# Altium PCB PCB1.PcbDoc
Units mil, origin at the board's own origin, x right, y up, seen from the top; angles counter-clockwise.
Board outline 2820 x 2327.84 mil, 4 copper layers (Top Layer, Layer 1, Layer 2, Bottom Layer), stack 23.756 mil thick; 37 components, 29 nets, 121 pads, 10 vias.
Unrouted connection lines stored in the file: 2.
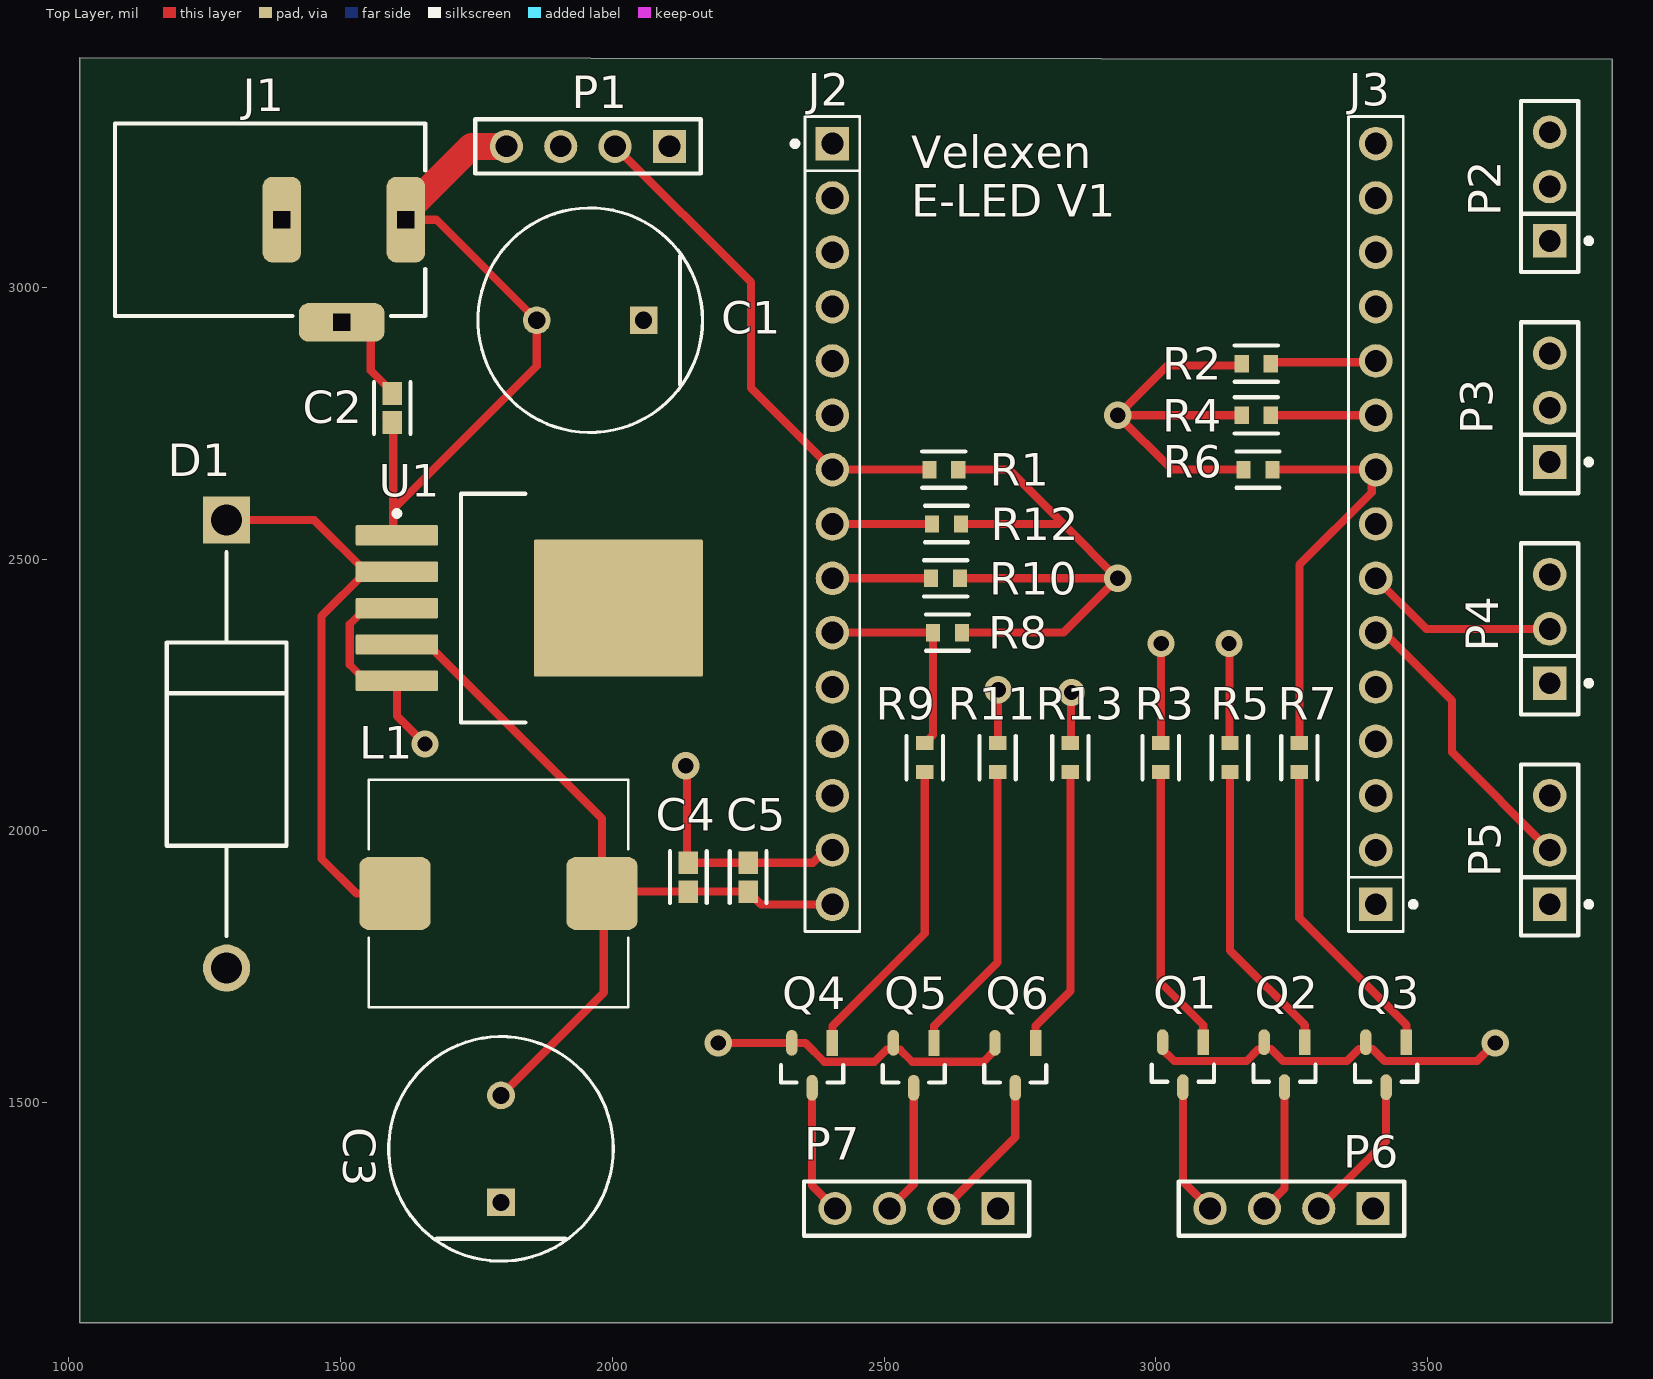
[diagram p0: Top Layer view]
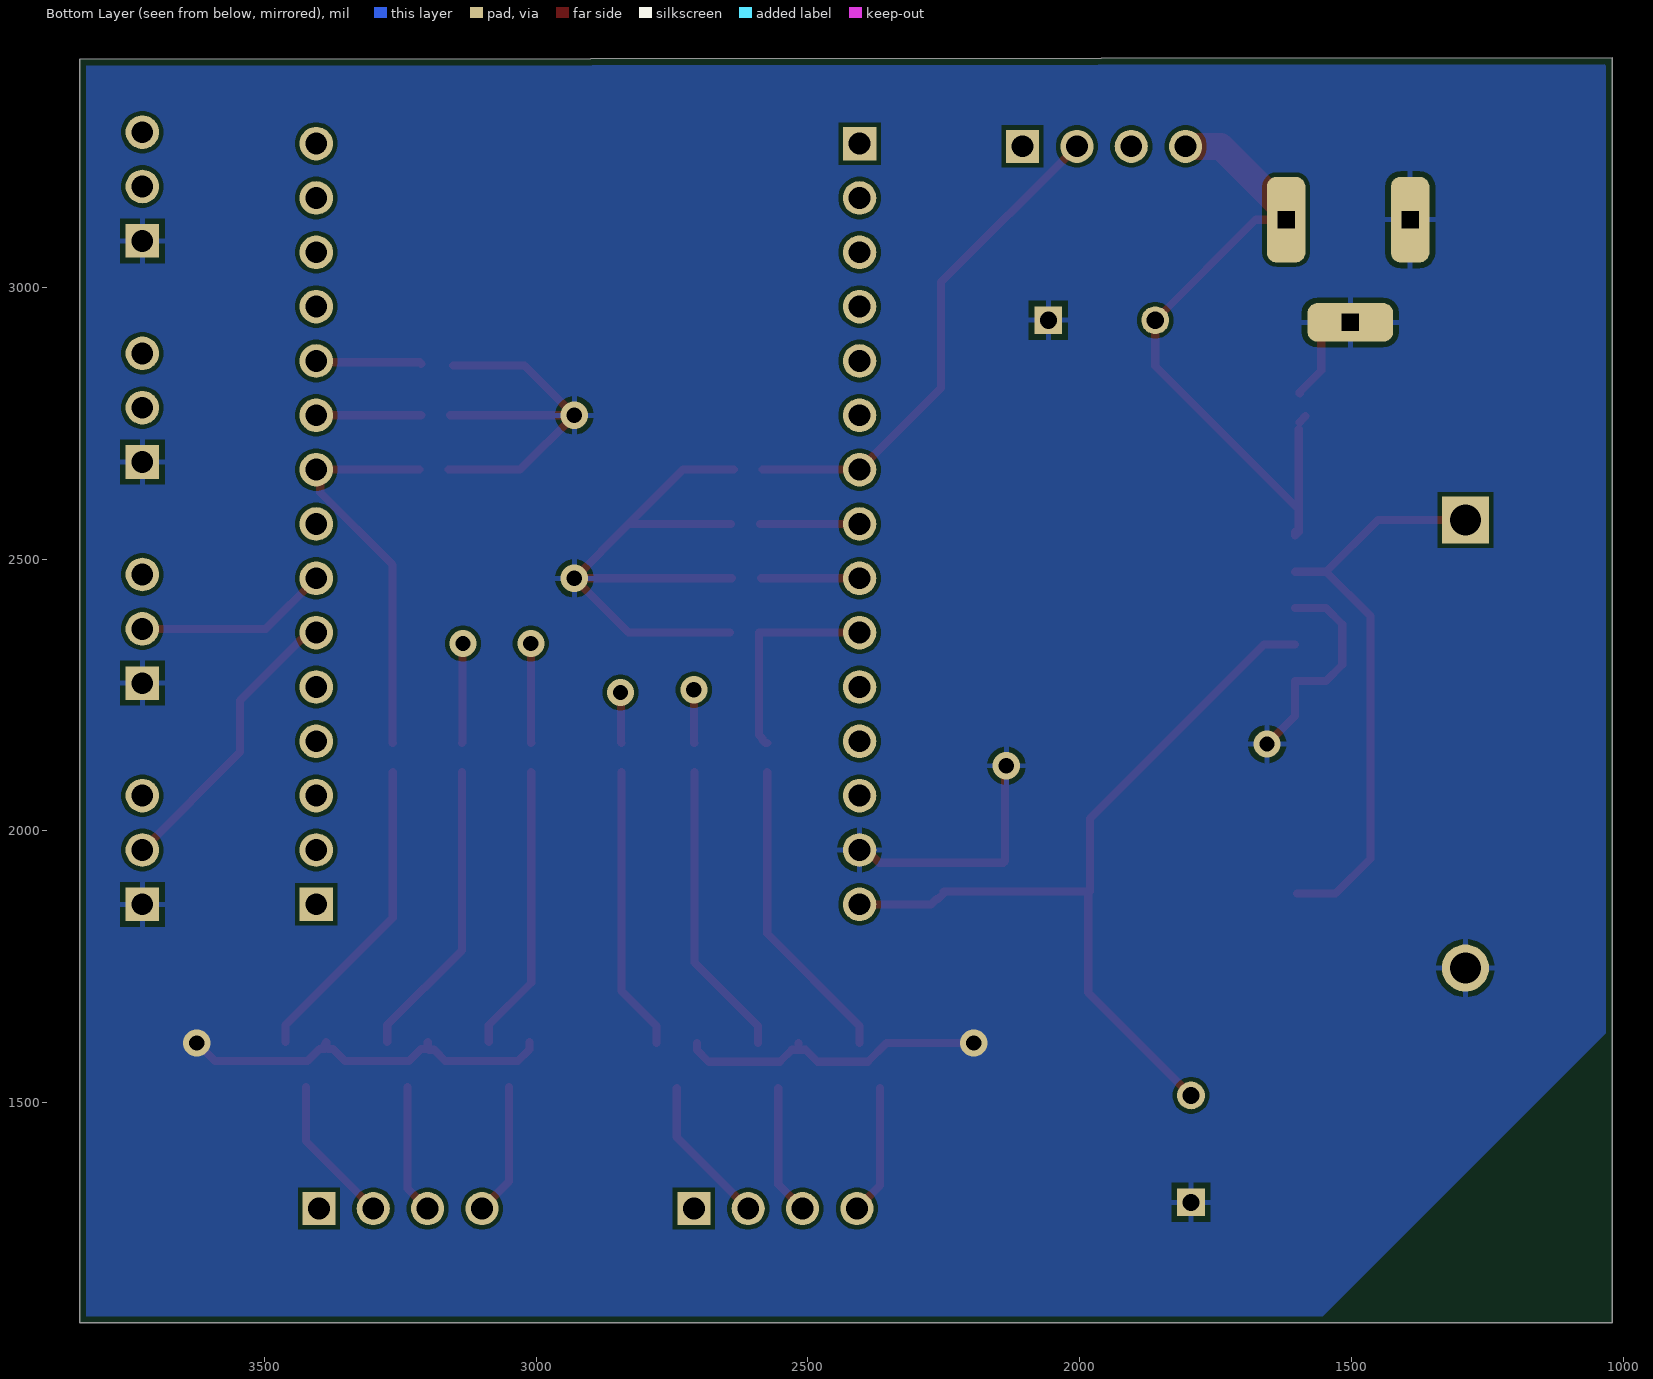
[diagram p1: Bottom Layer view, seen from below]
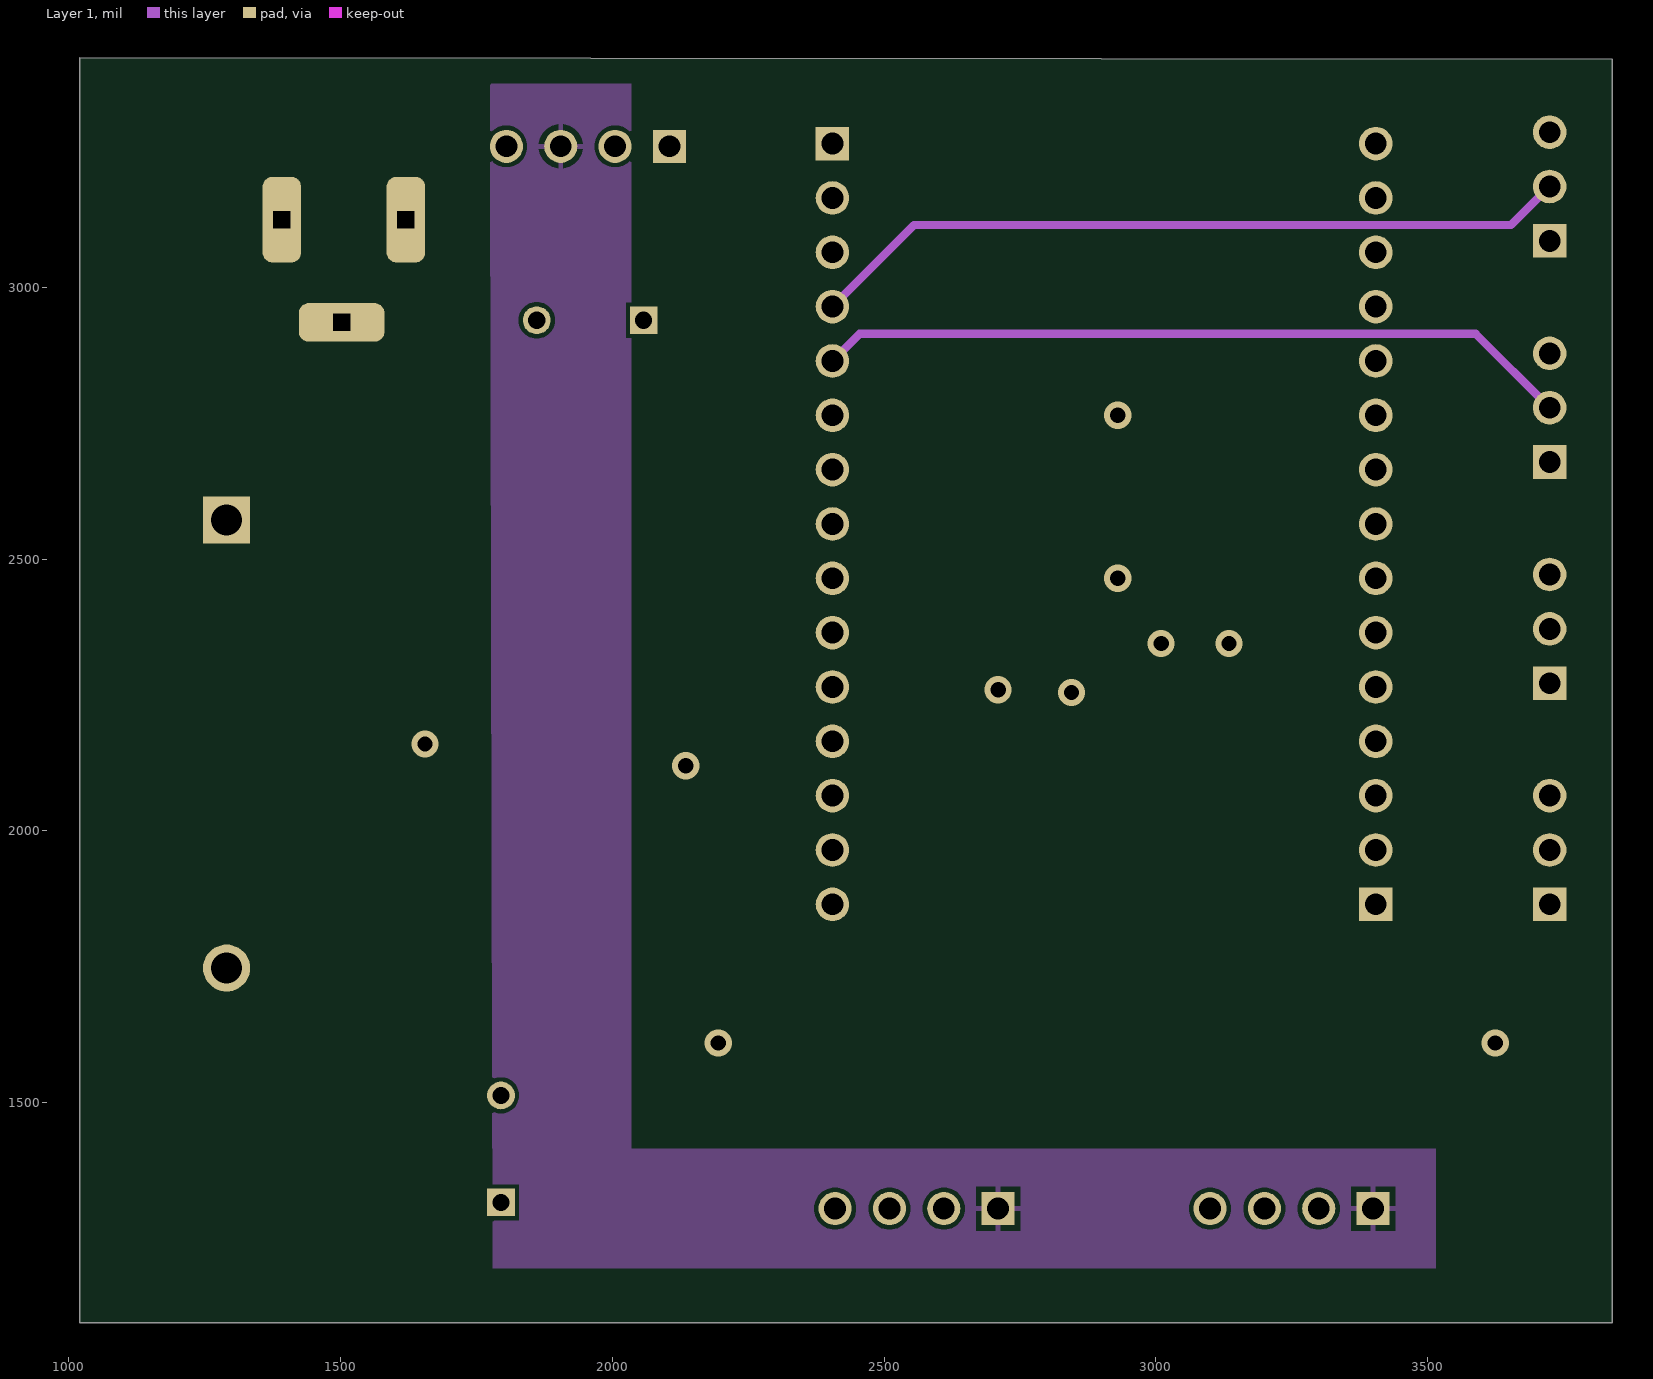
[diagram p2: Layer 1]
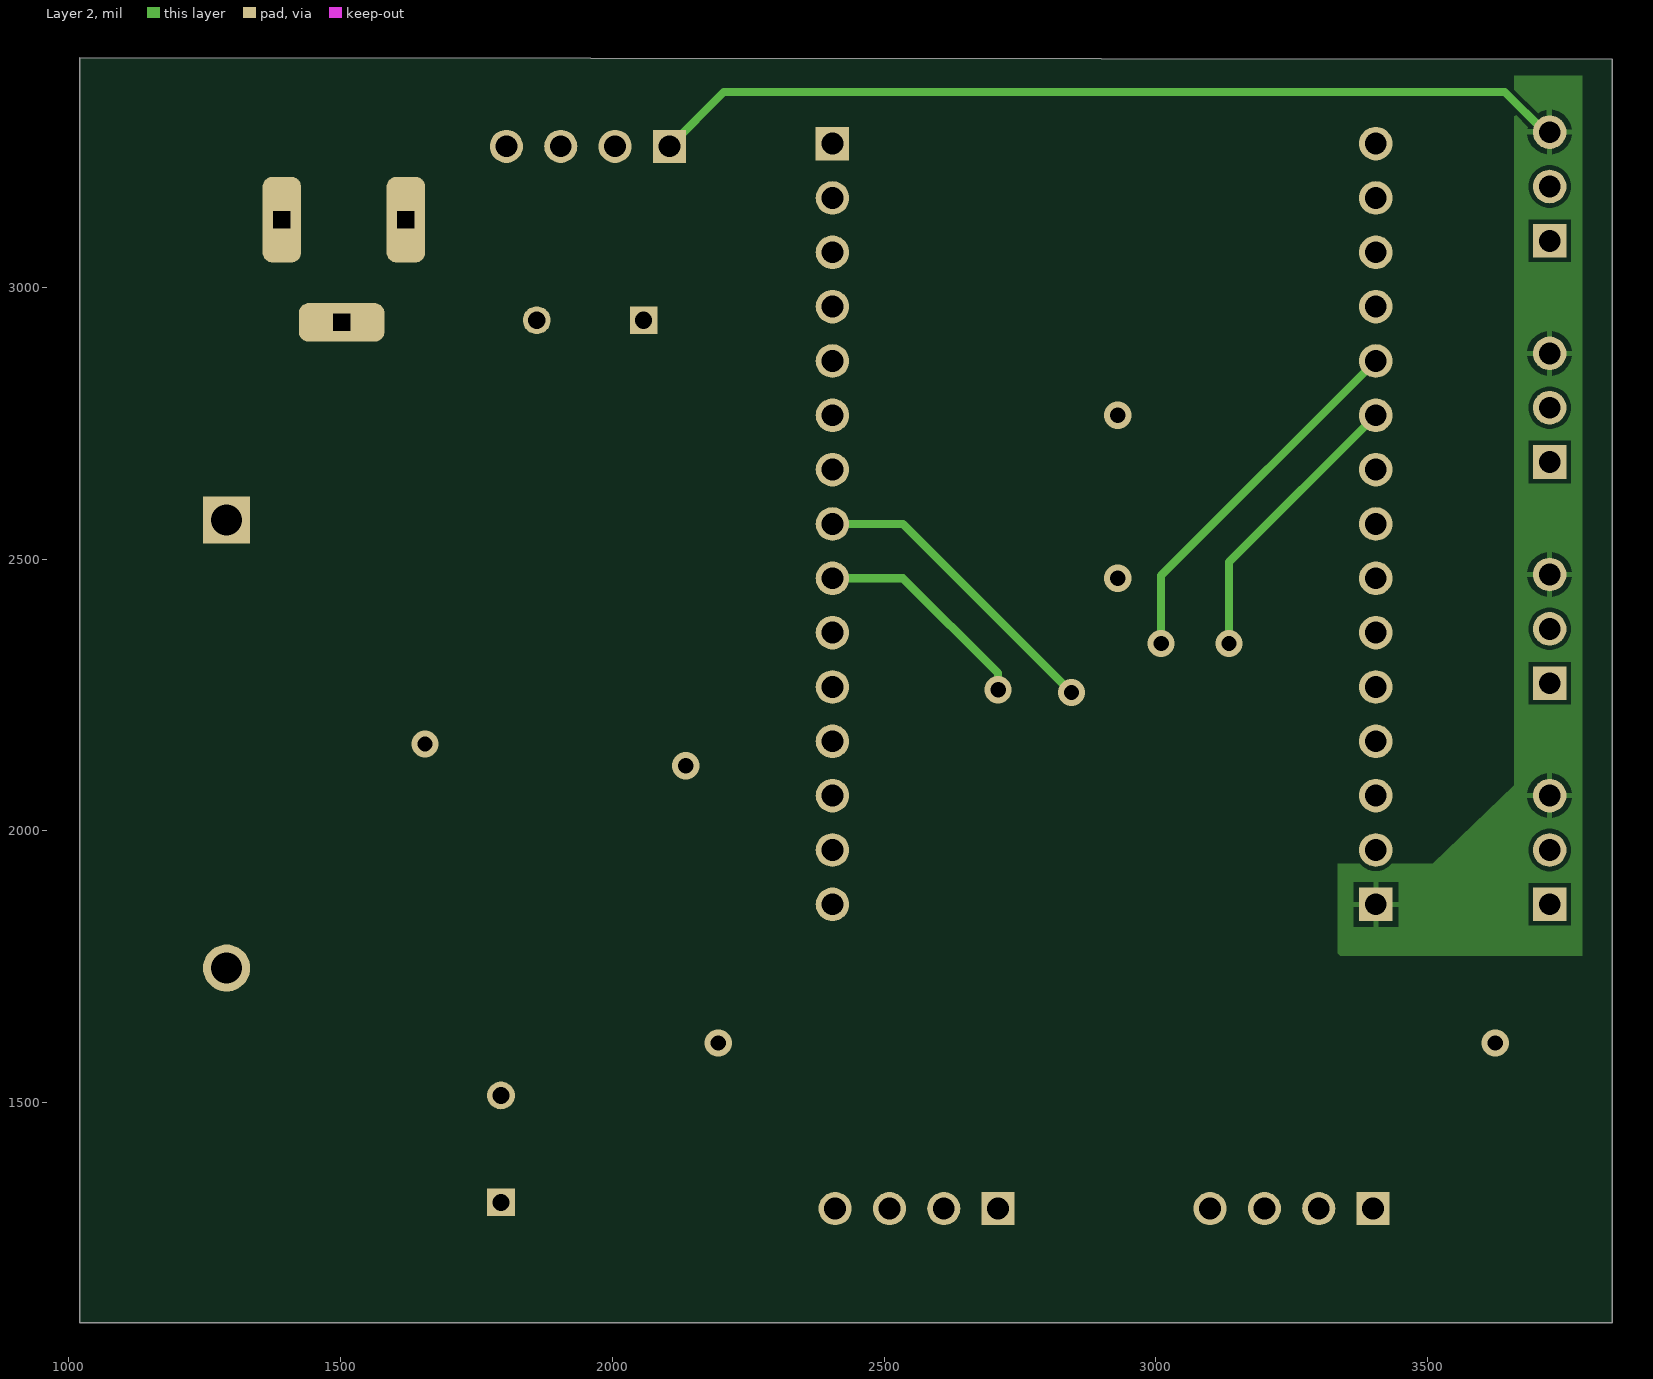
[diagram p3: Layer 2]
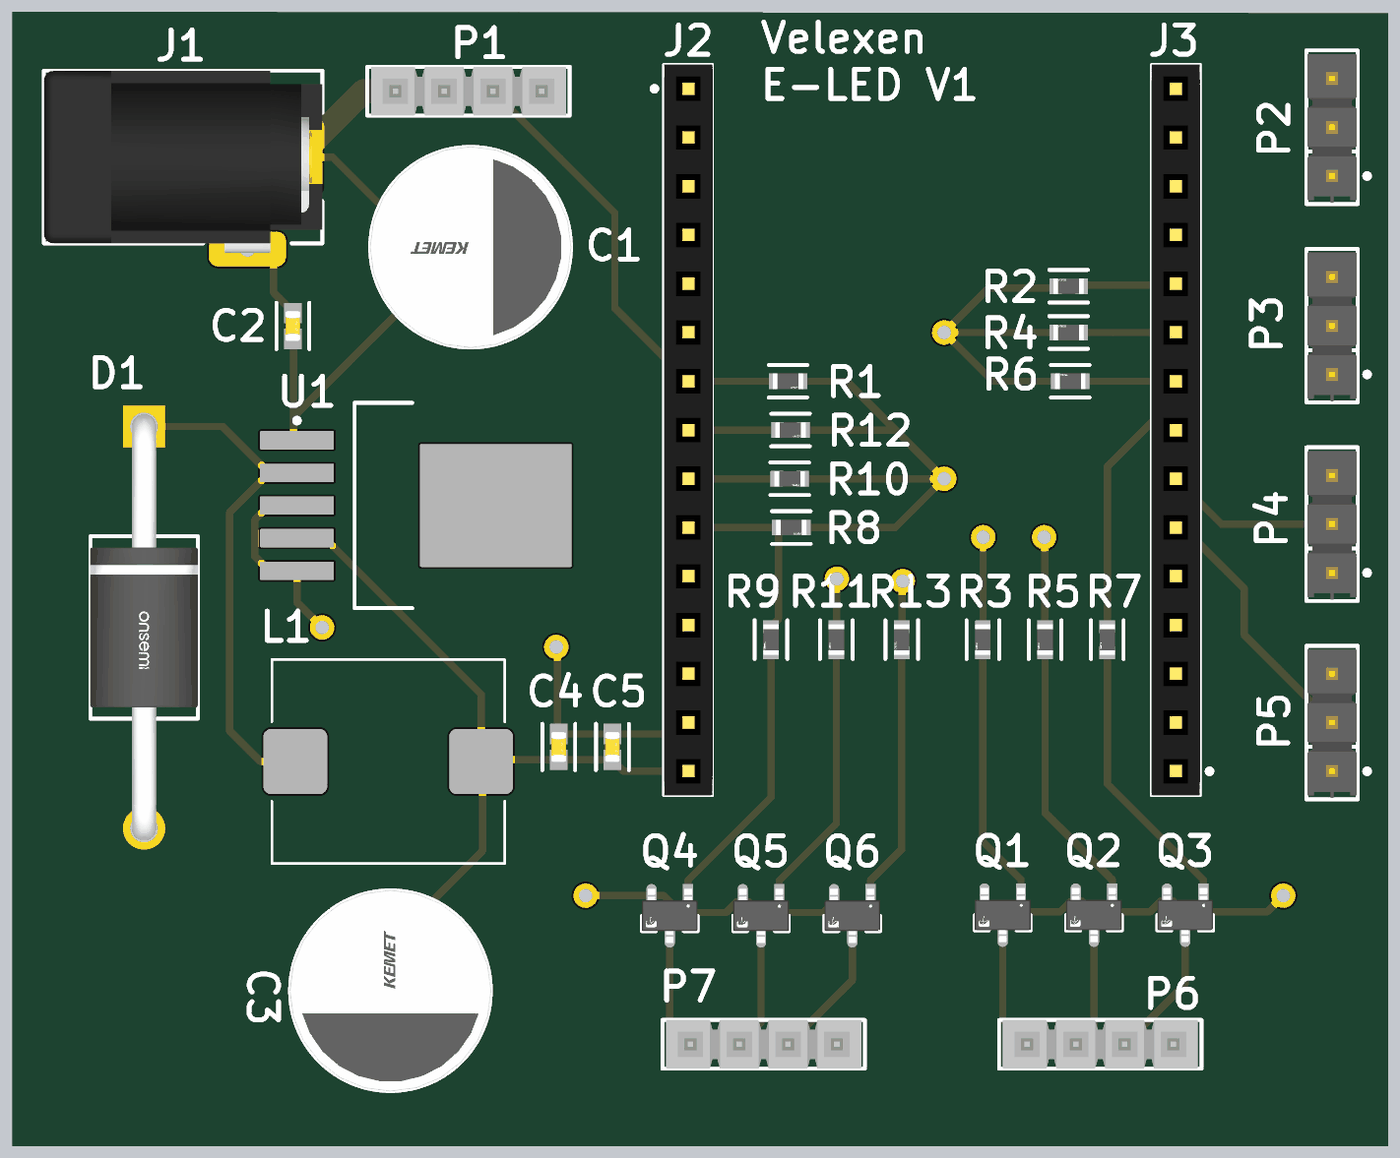
[diagram p4: 3D render of the assembled board from above, using the file's embedded part models]

## Layer stack, top to bottom
Top Solder: solder mask 0.4, Solder Resist, Dk 3.5
Top Layer: signal copper 1.4
Dielectric 2: prepreg 2.8, PP-006, Dk 4.1
Layer 1: signal copper 1.378
Dielectric 1: dielectric 12.6, FR-4, Dk 4.8
Layer 2: signal copper 1.378
Dielectric 3: prepreg 2.8, PP-006, Dk 4.1
Bottom Layer: signal copper 1.4
Bottom Solder: solder mask 0.4, Solder Resist, Dk 3.5

## Board outline
1020,1095 1020,3420 1020,3422.84 3840,3419.99 3840,3420 3840,1095

## Design rules (kind name [scope] priority, off if disabled: settings)
BoardOutlineClearance [All] p1: gap=11.81 ignorepadtopadclearanceinfootprint=FALSE except(15.75: Arc-SplitBarrior Arc-SplitContinuation Track-SplitBarrior Track-SplitContinuation SMDPad-SplitBarrior SMDPad-SplitContinuation THPad-SplitBarrior THPad-SplitContinuation Via-SplitBarrior Via-SplitContinuation Fill-SplitBarrior Fill-SplitContinuation Poly-SplitBarrior Poly-SplitContinuation Region-SplitBarrior Region-SplitContinuation Text-SplitBarrior Text-SplitContinuation)
Clearance "Clearance Different Nets" [All] p1: gap=7.87 ignorepadtopadclearanceinfootprint=FALSE except(3.5: Arc-Arc Arc-Track Arc-SMDPad Track-Track Track-SMDPad; 5: SMDPad-SMDPad SMDPad-Via THPad-Via Via-Via; 10: Arc-Via Arc-Text Track-Via Track-Text SMDPad-Text THPad-Text Via-Text Fill-Text Poly-Text Region-Text Text-Text; 19.68: THPad-THPad Via-Hole)
Clearance [All] p2: gap=10 ignorepadtopadclearanceinfootprint=FALSE
Clearance "Clearance Same Nets" [All] p3: gap=7.87 ignorepadtopadclearanceinfootprint=FALSE except(3.5: Arc-Arc Arc-Track Arc-SMDPad Track-Track Track-SMDPad SMDPad-SMDPad; 5: SMDPad-Via THPad-Via; 10: Arc-Via Arc-Text Track-Via Track-Text SMDPad-Text THPad-Text Via-Via Via-Text Fill-Text Poly-Text Region-Text Text-Text)
Clearance "Clearance Bottom Layer" [OnLayer('Bottom Layer')] p4: gap=8 ignorepadtopadclearanceinfootprint=TRUE except(10: Arc-Text Track-Text SMDPad-Text THPad-Text Via-Text Fill-Text Poly-Text Region-Text Text-Text)
Clearance "Clearance Top Layer" [OnLayer('Top Layer')] p5: gap=8 ignorepadtopadclearanceinfootprint=TRUE except(10: Arc-Text Track-Text SMDPad-Text THPad-Text Via-Text Fill-Text Poly-Text Region-Text Text-Text)
HoleSize [All] p1: absolutevalues=TRUE maxlimit=248.03 minlimit=8 maxpercent=80.000 minpercent=20.000
HoleToHoleClearance [All] p1: gap=12 allowstackedmicrovias=TRUE
MinimumAnnularRing [All] p1: minimumring=0.8
MinimumSolderMaskSliver [All] p1: minsoldermaskwidth=3.94
PolygonConnect [All] p1: connectstyle=Relief reliefconductorwidth=10 reliefentries=4 polygonreliefangle="90 Angle" airgapwidth=10
PolygonConnect PolygonConnect_1 [All] p2: thpad.connectstyle=Relief thpad.reliefconductorwidth=20 thpad.reliefentries=4 thpad.polygonreliefangle="90 Angle" thpad.airgapwidth=10 smdpad.connectstyle=Relief smdpad.reliefconductorwidth=20 smdpad.reliefentries=4 smdpad.polygonreliefangle="90 Angle" smdpad.airgapwidth=10 via.connectstyle=Direct via.reliefconductorwidth=20 via.reliefentries=4 via.polygonreliefangle="90 Angle" via.airgapwidth=10
RoutingCorners [All] p1: cornerstyle=Round minsetback=100 maxsetback=100
RoutingVias [All] p1: holewidth=19.68 width=39.37 viastyle="Through Hole" minholewidth=7.87 minwidth=13.78 maxholewidth=39.37 maxwidth=78.74
SilkToSilkClearance [All] p1: silktosilkclearance=3.94
SilkToSolderMaskClearance [IsPad] p1: minsilkscreentomaskgap=3.94 clearancetoexposedcopper=TRUE
SolderMaskExpansion [All] p1: expansion=4 istentingtop=FALSE
SupplyNets "Schematic Supply Nets_4" [InNet('+3V3')] p1: voltage=0.000
SupplyNets "Schematic Supply Nets_3" [InNet('+5')] p2: voltage=0.000
SupplyNets "Schematic Supply Nets_2" [InNet('+24_LED')] p3: voltage=0.000
SupplyNets "Schematic Supply Nets_1" [InNet('GND')] p4: voltage=0.000
SupplyNets "Schematic Supply Nets" [InNet('+24V')] p5: voltage=0.000
Width [All] p1: maxlimit=100 minlimit=5 preferedwidth=15
24 further rules are at their usual default settings.

## Classes and differential pairs
component class Power: C1 C2 C3 C4 D1 J1 L1 U1
component class MosFets: P6 P7 Q1 Q2 Q3 Q4 Q5 Q6 R2 R3 R4 R5 R6 R7 R8 R9 R10 R11 R12 R13
component class ESP32_Pins: C5 J2 J3 P1 P2 P3 P4 P5 R1

## Components (designator, comment, footprint, x,y, rotation, side; value= is the part's Value field where it differs from the comment)
C1 "ERS1VM471G16OT" FP-A750MV227M1HAAE020-MFG 1959.25,2940 r180 top value=470µF
C2 "CC0603KRX7R9BB104" FP-CC0603-DA-IPC_B 1595,2778.35 r90 top value=100nF
C3 "ERS1VM471G16OT" FP-A750MV227M1HAAE020-MFG 1795,1415 r90 top value=470µF
C4 "CC0603KRX7R9BB104" FP-CC0603-DA-IPC_B 2140,1915 r90 top value=100nF
C5 "CC0603KRX7R9BB104" FP-CC0603-DA-IPC_B 2250,1915 r90 top value=100nF
D1 "1N5824" FP-017AF-MFG 1290,2160 r270 top value=75pF
J1 "DC-005-A200" 694108301002 1370,3125 r270 top
J2 "ZX-PM2.54-1-15PY" 68000-115HLF_MFG 2405,2565 r270 top
J3 "ZX-PM2.54-1-15PY" 68000-115HLF_MFG 3405,2565 r90 top
L1 "YSPI1050-680M" CAPM115100X500N 1790.45,1885 r0 top value=68µH
P1 "Power Switch" SMTC-TSW-104-08-X-S 2105,3260 r180 top
P2 "Color Header" FP-TSW-103-14-G-S-MFG 3725,3186.02 r90 top
P3 "Brigthness Header" FP-TSW-103-14-G-S-MFG 3725,2779.02 r90 top
P4 "Selector Sw Header" FP-TSW-103-14-G-S-MFG 3725,2372.01 r90 top
P5 "Color Btn Header" FP-TSW-103-14-G-S-MFG 3725,1965 r90 top
P6 "LED_Strip_1" SMTC-TSW-104-08-X-S 3400,1305 r180 top
P7 "LED_Strip_2" SMTC-TSW-104-08-X-S 2710,1305 r180 top
Q1 "AO3400A" FP-SOT23-IPC_C 3050,1570 r270 top
Q2 "AO3400A" FP-SOT23-IPC_C 3237,1570 r270 top
Q3 "AO3400A" FP-SOT23-IPC_C 3424,1570 r270 top
Q4 "AO3400A" FP-SOT23-IPC_C 2367.6,1568.64 r270 top
Q5 "AO3400A" FP-SOT23-IPC_C 2554.6,1568.64 r270 top
Q6 "AO3400A" FP-SOT23-IPC_C 2741.6,1568.64 r270 top
R1 "0603WAF1002T5E" FP-AC0603-IPC_C 2610,2665 r0 top value=10k
R2 "0603WAF1002T5E" FP-AC0603-IPC_C 3185,2860 r180 top value=10k
R3 "0603WAF1000T5E" FP-AC0603-IPC_C 3009.25,2135 r270 top value=100
R4 "0603WAF1002T5E" FP-AC0603-IPC_C 3185,2765 r180 top value=10k
R5 "0603WAF1000T5E" FP-AC0603-IPC_C 3136.75,2135 r270 top value=100
R6 "0603WAF1002T5E" FP-AC0603-IPC_C 3188.36,2665 r180 top value=10k
R7 "0603WAF1000T5E" FP-AC0603-IPC_C 3264.25,2135 r270 top value=100
R8 "0603WAF1002T5E" FP-AC0603-IPC_C 2616.64,2365 r0 top value=10k
R9 "0603WAF1000T5E" FP-AC0603-IPC_C 2575,2135 r270 top value=100
R10 "0603WAF1002T5E" FP-AC0603-IPC_C 2613.36,2465 r0 top value=10k
R11 "0603WAF1000T5E" FP-AC0603-IPC_C 2709,2135 r270 top value=100
R12 "0603WAF1002T5E" FP-AC0603-IPC_C 2615,2565 r0 top value=10k
R13 "0603WAF1000T5E" FP-AC0603-IPC_C 2843,2135 r270 top value=100
U1 "LM2596S-5.0(UMW)" KTT0005B_L 1847.6,2410.13 r0 top

## Footprints (in the part's own frame and the unit in brackets; to place one, negate y for a bottom-side part, rotate by r counter-clockwise, add the part's x,y. Pads: shape width x height; smd on the part's side, far side on the other; paste and mask are expansions set on the pad)
68000-115HLF_MFG [mm] "Recommended Land Pattern"
  rect 1.57x1.57 hole 1.02: 1(-17.78,0)
  round 1.57 hole 1.02: 2(-15.24,0) 3(-12.7,0) 4(-10.16,0) 5(-7.62,0) 6(-5.08,0) 7(-2.54,0) 8(0,0) 9(2.54,0) 10(5.08,0) 11(7.62,0) 12(10.16,0) 13(12.7,0) 14(15.24,0) 15(17.78,0)
  silkscreen extent -19.05,-1.87 19.05,1.28, body extent -19.05,-1.26 19.05,1.28, height 8
694108301002 [mm] "DC Power Jack Right Angled(6.4)"
  rrect50% 4x1.8 hole 0.8 square: 1(0,6.35) 2(0,0.55)
  rrect50% 1.8x4 hole 0.8 square: 3(4.8,3.35)
  silkscreen extent -4.5,-7.25 4.5,7.25, body extent -4.5,-7.25 5,7.25, height 10.75
CAPM115100X500N [mm] "Molded Capacitor, 2-Leads, Body 11,50x10,00mm, IPC Medium Density"
  rrect25% 3.325x3.4 smd: 1(-4.838,0) 2(4.837,0)
  silkscreen extent -6.06,-5.31 6.06,5.31, body extent -5.75,-5 5.75,5, height 5
FP-017AF-MFG [mm]
  rect 2.2x2.2 hole 1.45 paste-2539.97 mask+0: 1(-10.47,0)
  round 2.2 hole 1.45 paste-2539.97 mask+0: 2(10.47,0)
  silkscreen extent -8.97,-2.8 8.97,2.8, body extent -11.67,-2.9 11.67,2.9, height 0.25
FP-A750MV227M1HAAE020-MFG [mm]
  rect 1.3x1.3 hole 0.8 paste-2539.97 mask+0: 1(-2.5,0)
  round 1.3 hole 0.8 paste-2539.97 mask+0: 2(2.5,0)
  silkscreen extent -5.25,-5.25 5.25,5.25, body extent -5.35,-5.35 5.35,5.35, height 0.25
FP-AC0603-IPC_C [mil]
  rect 25.93x31.97 smd paste+0 mask+0: 1(-26.64,0) 2(26.64,0)
  silkscreen extent -40,-33 40,33, body extent -44,-22 44,22, height 10
FP-CC0603-DA-IPC_B [mil]
  rect 41.66x35.91 smd paste+0 mask+0: 1(-26.65,0) 2(26.65,0)
  silkscreen extent -47,-34 47,34, body extent -57,-28 57,28, height 10
FP-SOT23-IPC_C [mm]
  rect 1.205x0.532 smd paste+0 mask+0: 1(-1.05,0.95)
  rrect100% 1.205x0.532 smd paste+0 mask+0: 2(-1.05,-0.95) 3(1.05,0)
  silkscreen extent 0,-1.45 0.8,1.45, body extent -1.75,-1.55 1.75,1.55, height 0.25
FP-TSW-103-14-G-S-MFG [mm]
  rect 1.57x1.57 hole 1.02 paste-2539.97 mask+0: 1(-2.54,0)
  round 1.57 hole 1.02 paste-2539.97 mask+0: 2(0,0) 3(2.54,0)
  silkscreen extent -4,-1.95 4,1.34, body extent -4.1,-1.44 4.1,1.44, height 0.25
KTT0005B_L [mm] "DPAK, 5-Leads, Body 10.65x9.65mm, Pitch 1.7mm, IPC High Density"
  rrect11% 3.85x0.95 smd: 1(-6.2,3.4) 2(-6.2,1.7) 3(-6.2,0) 4(-6.2,-1.7) 5(-6.2,-3.4)
  rrect2% 7.9x6.4 smd: 6(4.15,0)
  silkscreen extent -6.32,-5.35 -0.2,5.35, body extent -3.2,-5.32 6.45,5.33, height 4.83
SMTC-TSW-104-08-X-S [mm] ".025 SQ Post Terminal Strip Assembly, 1x4 Pins, Vertical, 2.54mm Pitch, Male"
  rect 1.55x1.55 hole 1.02: 1(0,0)
  round 1.55 hole 1.02: 2(2.54,0) 3(5.08,0) 4(7.62,0)
  silkscreen extent -1.46,-1.27 9.08,1.27, body extent -1.27,-1.27 8.89,1.27, height 8.38

## Part data
C1: library part CMP-001-00083-2, "10mm 16mm 35V 470uF 5mm 7000hrs@105℃ ±20% 插件,D10xL16mm Aluminum Electrolytic Capacitors - Leaded ROHS", Case/Package=Radial, ESR (Equivalent Series Resistance)=20mΩ, JLCPCB Part #=C106703, Leakage Current=2.2mA, Manufacturer="AISHI(Aihua Group)", Max Operating Temperature=105°C, Min Operating Temperature=-55°C, Ripple Current=215mA, Tolerance=20%, Voltage Rating=35V, Voltage Rating (DC)=50V, Diameter=10mm, Dissipation Factor=12%, Height=16mm, Length=14mm, Life (Hours)=2000hours, Lifecycle Status=Production, MFR.Part #=ERS1VM471G16OT, Number of Terminals=2, Packaging=Bulk, REACH SVHC=Yes, RoHS=Compliant, Terminal Pitch=5mm
C2: library part CMP-001-00084-2, "Multilayer Ceramic Capacitor, CC Series, 0.1 - F, - 10%, X7R, 50 V, 0603 [1608 Metric]", Case Code (Imperial)=0603, Case Code (Metric)=1608, Dielectric=X7R, Dielectric Material=Ceramic, JLCPCB Part #=C14663, Manufacturer=YAGEO, Max Operating Temperature=125°C, Min Operating Temperature=-55°C, Tolerance=10%, Voltage=50V, Case/Package=0603, China RoHS=Compliant, Country of Origin="Mainland China, Taiwan", Depth=800µm, Export Control Classification Number (ECCN) Code=EAR99, Halogen Free="Halogen Free", Harmonized Tariff Schedule (HTS) Code=8532.24.00.20, Height=800µm, Introduction Date=2005-08-18, Lead Free="Lead Free", Length=1.6mm, Lifecycle Status=Production, Material=Ceramic, MFR.Part #=CC0603KRX7R9BB104, Mounting Technology="Surface Mount", Number of Terminals=2, Pins=2, Radiation Hardening=No, REACH SVHC=Yes, RoHS=Compliant, Schedule B="8532240020, 8532240020", Termination=SMD/SMT, Thickness=889µm, Voltage Rating=50V, Voltage Rating (DC)=50V, Width=800µm
C3: library part CMP-001-00083-1, "10mm 16mm 35V 470uF 5mm 7000hrs@105℃ ±20% 插件,D10xL16mm Aluminum Electrolytic Capacitors - Leaded ROHS", Case/Package=Radial, ESR (Equivalent Series Resistance)=20mΩ, Leakage Current=2.2mA, Max Operating Temperature=105°C, Min Operating Temperature=-55°C, Ripple Current=215mA, Tolerance=20%, Voltage Rating=35V, Voltage Rating (DC)=50V, Diameter=10mm, Dissipation Factor=12%, Height=16mm, Length=14mm, Life (Hours)=2000hours, Lifecycle Status=Production, Number of Terminals=2, Packaging=Bulk, REACH SVHC=Yes, RoHS=Compliant, Terminal Pitch=5mm
C4 C5: library part CMP-001-00084-1, "Multilayer Ceramic Capacitor, CC Series, 0.1 - F, - 10%, X7R, 50 V, 0603 [1608 Metric]", Case Code (Imperial)=0603, Case Code (Metric)=1608, Dielectric=X7R, Dielectric Material=Ceramic, Max Operating Temperature=125°C, Min Operating Temperature=-55°C, Tolerance=10%, Voltage=50V, Case/Package=0603, China RoHS=Compliant, Country of Origin="Mainland China, Taiwan", Depth=800µm, Export Control Classification Number (ECCN) Code=EAR99, Halogen Free="Halogen Free", Harmonized Tariff Schedule (HTS) Code=8532.24.00.20, Height=800µm, Introduction Date=2005-08-18, Lead Free="Lead Free", Length=1.6mm, Lifecycle Status=Production, Material=Ceramic, Mounting Technology="Surface Mount", Number of Terminals=2, Pins=2, Radiation Hardening=No, REACH SVHC=Yes, RoHS=Compliant, Schedule B="8532240020, 8532240020", Termination=SMD/SMT, Thickness=889µm, Voltage Rating=50V, Voltage Rating (DC)=50V, Width=800µm
D1: library part CMP-004-00031-2, "-55℃~+150℃ 150A 30V 500uA@30V 550mV@5A 5A Independent DO-201AD Schottky Diodes ROHS", Average Rectified Current=3A, Case/Package=Axial, Forward Current=5A, Forward Voltage=550mV, JLCPCB Part #=C7503125, Manufacturer=FUXINSEMI, Max Forward Surge Current (Ifsm)=125A, Max Junction Temperature (Tj)=150°C, Max Power Dissipation=6.25W, Max Reverse Voltage (DC)=400V, Max Surge Current=150A, Min Operating Temperature=-65°C, Natural Thermal Resistance=20°C/W, Package=DO-201AD, Current Rating=3A, Diameter=5.6mm, Element Configuration=Single, Height=5.6mm, Max Operating Temperature=150°C, Max Output current=3A, MFR.Part #=1N5824, Mounting Technology="Through Hole", Number of Elements=1, Number of Terminals=2, Output Current=5A, Pins=2, Polarity=Standard, Power Dissipation=6.25W, Recovery Time=50ns, Reverse Recovery Time=50ns, Reverse Voltage=400V, Voltage Rating (DC)=400V
J1: library part CMP-002-00073-1, "-20℃~+70℃ 2mm 30V 3A 6.4mm DC Power Jack Right Angle 插件 DC Power Connectors ROHS", Color=Black, Current Rating=3A, Flammability Rating="UL94 V-0", Insulation Resistance=100MΩ, JLCPCB Part #=C720557, Manufacturer=XUNPU, Manufacturer Lifecycle Status=ACTIVE, Max Operating Temperature=70°C, Min Operating Temperature=-20°C, Operating Supply Voltage=24V, Voltage Rating=30V, Connector Type=Power, Contact Gender=Female, Contact Material="Gold, Tin", Contact Plating=Tin, Gender=Male, Height=11mm, Housing Material=Polyamide, Lifecycle Status=Production, MFR.Part #=DC-005-A200, Mounting Technology="Through Hole", Number of Contacts=3, Packaging=Bulk, REACH SVHC=Unknown, RoHS=Compliant, Shielding=Unshielded, Termination="Through Hole", YEOL="1 = Estimated lifetime > 10 years"
J2 J3: library part CMP-002-00071-2, "-40℃~+105℃ 1 15P 1x15P 2.54mm 3.2mm 3A 8.5mm Brass Gold Square Hole Through Hole Top 插件,P=2.54mm Female Headers ROHS", Case/Package=Plugin,P=2.54mm, JLCPCB Part #=C7499333, Manufacturer=Megastar, Max Current Rating=3A, Max Operating Temperature=105°C, Min Operating Temperature=-40°C, Connector Type=Plugin, Gender=Female, MFR.Part #=ZX-PM2.54-1-15PY, Mounting Technology="Through Hole", Pins=15, RoHS Compliant=Yes
L1: library part CMP-006-00021-1, "240mΩ 3A 4A 68uH Molded Inductor ±20% SMD,11.5x10mm Power Inductors ROHS", DC Resistance (DCR)=240mΩ, JLCPCB Part #=C497902, Manufacturer=YJYCOIN, Max Current Rating=4A, Max Operating Temperature=125°C, Min Operating Temperature=-40°C, Package=SMD,11.5x10mm, Test Frequency=100kHz, Tolerance=20%, Height=5mm, Length=11.5mm, MFR.Part #=YSPI1050-680M, Mounting Technology=SMD, Number of Circuits=1, Number of Terminals=2, Pins=2, Shielding=Unshielded, Width=10mm
P1 P6 P7: library part CMP-002-00072-1, "Conn Unshrouded Header HDR 4 POS 2.54mm Solder ST Top Entry Thru-Hole Bulk", Case/Package=Plugin,P=2.54mm, Max Current Rating=7.6A, Max Operating Temperature=125°C, Min Operating Temperature=-55°C, Connector Type="Male Pin", Contact Material=Bronze, Gender=Male, Mounting Technology="Throgh Hole", Pins=4, Pitch=2.54mm
P2 P3 P4 P5: library part CMP-002-00074-2, "Pin Header, Board-to-Board, 2.54 mm, 1 Rows, 3 Contacts, Through Hole, TSW", Case/Package=Plugin,P=2.54mm, Max Current Rating=7.6A, Max Operating Temperature=125°C, Min Operating Temperature=-55°C, Connector Type="Male Pin", Gender=Male, Mounting Technology="Through Hole", Pins=3, Pitch=2.54mm
Q1: library part CMP-013-00034-2, "-55℃~+150℃ 1 N-channel 1.45V 1.4W 30V 48mΩ@2.5V 5.7A 50pF 630pF 75pF 7nC@10V N-Channel SOT-23 MOSFETs ROHS", Case/Package=SOT-23, Continuous Drain Current (ID)=5.7A, Drain to Source Breakdown Voltage=30V, Drain to Source Resistance=26.5mΩ, Gate to Source Voltage (Vgs)=12V, Input Capacitance=630pF, JLCPCB Part #=C20917, Manufacturer="Alpha & Omega Semicon", Max Junction Temperature (Tj)=150°C, Max Power Dissipation=1.4W, Min Operating Temperature=-55°C, Threshold Voltage=650mV, Country of Origin="Mainland China", Drain to Source Voltage (Vdss)=30V, Export Control Classification Number (ECCN) Code=EAR99, Height=1.25mm, Introduction Date=2007-04-17, Lead Free="Lead Free", Lifecycle Status=Production, Max Operating Temperature=150°C, MFR.Part #=AO3400A, Min Breakdown Voltage=30V, Mounting Technology="Surface Mount", Number of Channels=1, Number of Elements=1, Number of Terminals=3, Pins=3, Power Dissipation=1.4W, Radiation Hardening=No, Rds On Max=26.5mΩ, REACH SVHC=Yes, RoHS=Compliant, Schedule B="8541290080, 8541290080", Turn-Off Delay Time=25ns, Turn-On Delay Time=3ns
Q2 Q3 Q4 Q5 Q6: library part CMP-013-00034-1, "Trans MOSFET N-CH 30V 5.7A 3-Pin SOT-23", Case/Package=SOT-23, Continuous Drain Current (ID)=5.7A, Drain to Source Breakdown Voltage=30V, Drain to Source Resistance=26.5mΩ, Gate to Source Voltage (Vgs)=12V, Input Capacitance=630pF, Max Junction Temperature (Tj)=150°C, Max Power Dissipation=1.4W, Min Operating Temperature=-55°C, Threshold Voltage=650mV, Country of Origin="Mainland China", Drain to Source Voltage (Vdss)=30V, Export Control Classification Number (ECCN) Code=EAR99, Height=1.25mm, Introduction Date=2007-04-17, Lead Free="Lead Free", Lifecycle Status=Production, Max Operating Temperature=150°C, Min Breakdown Voltage=30V, Mounting Technology="Surface Mount", Number of Channels=1, Number of Elements=1, Number of Terminals=3, Pins=3, Power Dissipation=1.4W, Radiation Hardening=No, Rds On Max=26.5mΩ, REACH SVHC=Yes, RoHS=Compliant, Schedule B="8541290080, 8541290080", Turn-Off Delay Time=25ns, Turn-On Delay Time=3ns
R1 R2 R4 R8 R10 R12: library part CMP-009-00177-1, "Res Thick Film 0603 10K Ohm 1% 0.1W(1/10W) ±100ppm/C Pad SMD", Case/Package=0603, Max Operating Temperature=155°C, Min Operating Temperature=-55°C, Tolerance=5%, Voltage Rating=75V, Mounting Technology="Surface Mount"
R3 R5 R7 R9 R11 R13: library part CMP-009-00178-1, "-55℃~+155℃ 100mW 100Ω 75V Thick Film Resistor ±1% ±100ppm/℃ 0603 Chip Resistor - Surface Mount ROHS", Case/Package=0603, JLCPCB Part #=C22775, Manufacturer="UNI-ROYAL(Uniroyal Elec)", Max Operating Temperature=155°C, Min Operating Temperature=-55°C, Power=100mW, Tolerance=1%, Voltage Rating=75V, MFR.Part #=0603WAF1000T5E, Mounting Technology=SMD, Pins=2
R6: library part CMP-009-00177-2, "Res Thick Film 0603 10K Ohm 1% 0.1W(1/10W) ±100ppm/C Pad SMD", Case/Package=0603, JLCPCB Part #=C25804, Manufacturer="UNI-ROYAL(Uniroyal Elec)", Max Operating Temperature=155°C, Min Operating Temperature=-55°C, Tolerance=5%, Voltage Rating=75V, MFR.Part #=0603WAF1002T5E, Mounting Technology="Surface Mount"
U1: library part CMP-031-00007-1, "-40℃~+125℃@(TA) 1 150kHz 3A 5V 7V~40V 80uA Buck Buck Built-in Fixed No TO-263-5 DC-DC Converters ROHS", Case/Package=TO-263, Frequency=150kHz, JLCPCB Part #=C347421, Manufacturer="UMW(Youtai Semiconductor Co., Ltd.)", Max Operating Temperature=125°C, Max Output current=3A, Max Supply Voltage=40V, Min Input Voltage=4.5V, Min Operating Temperature=-40°C, Nominal Output Voltage=5V, Quiescent Current=5mA, Switching Frequency=173kHz, Contact Plating=Tin, Efficiency=80%, Height=4.83mm, Length=10.16mm, MFR.Part #=LM2596S-5.0(UMW), Mounting Technology="Surface Mount", Number of Channels=1, Number of Outputs=1, Operating Supply Voltage=40V, Output Current=3A, Output Type=Fixed, Output Voltage=5V, Packaging="Cut Tape", Pins=5, Thickness=4.58mm, Topology=Buck, Weight=113.398093g, Width=8.42mm

## Via types
v1: diameter 50, hole 28, Top Layer to Bottom Layer, 10 vias

## Nets (pads, with @x,y where several pads share a name; then routed paths per layer and width w, separated by ;. In a path a pad name is that pad's centre, name@x,y a point inside that pad or via, vN(x,y) a via of type N, cw(c..) or ccw(c..) an arc to the next point about the centre after c; other vN are vias at no path point)
+3V3: J3.1 P1.1 P2.3 P3.3 P4.3 P5.3 | length 1692.1
  Layer 2 w15: P1.1 2205,3360 3642.27,3360 3716.25,3286.02 P2.3
+5: C3.2 C4.1 C5.1 J2.15 L1.2 U1.4 | length 1530
  Top Layer w15: U1.4 1660.6,2343.2 1980.91,2022.89 L1.2@1980.91,1888.35 ; C3.2 1984.25,1702.68 1984.25,1888.35 C4.1 C5.1 2250,1885.47 2260.46,1875.02 2263.33,1875.02 2273.35,1865 J2.15
+24_LED: P1.3 P6.1 P7.1
+24V: C1.2 C2.1 J1.1 P1.4 U1.1 | length 1222.2
  Top Layer w15: C2.1@1584.54,2763.35 1595,2752.89 C2.1 ; C2.1@1596.69,2740 1596.69,2598.51 1596.69,2550.81 U1.1 U1.1@1603.51,2550.81 ; 1603.51,2598.51 1860.83,2855.83 C1.2 1675.83,3125 J1.1
  Top Layer w50: J1.1@1620,3139.17 1740.83,3260 P1.4
Blue_PWM: J3.11 R2.1 R3.1 | length 1062.7
  Top Layer w15: R3.1 3009.63,2162.02 3009.63,2344.63 v1(3010,2345) ; R2.1 3214.14,2862.5 3402.5,2862.5 J3.11
  Layer 2 w15: v1(3010,2345) 3010,2470 J3.11
Blue_PWM_2: J2.10 R8.1 R9.1 | length 396.3
  Top Layer w15: J2.10 R8.1 2590,2176.64 2583.49,2170.13 2583.49,2167.11 2578.02,2161.64 R9.1
GND: C1.1 C2.2 C3.1 C4.2 C5.2 D1.2 J1.2 J1.3 J2.14 P2.1 P3.1 P4.1 P5.1 Q1.2 Q2.2 Q3.2 Q4.2 Q5.2 Q6.2 R1.2 R2.2 R4.2 R6.1 R8.2 R10.2 R12.2 U1.3 U1.5 | length 4305
  Top Layer w15: J1.3 1528.26,2936.02 1555.41,2908.87 1555.41,2847.46 1595,2807.87 C2.2 ; U1.3 1546.42,2410.13 1516.72,2380.43 1516.72,2305.98 1546.42,2276.28 U1.5 1603.51,2211.49 v1(1655,2160) ; v1(2135,2120) 2137.5,2117.5 2137.5,1944.15 C4.2 C5.2 2369.08,1941.65 2392.43,1965 J2.14 ; v1(2195,1610) Q4.2 2355.24,1610 2389.97,1575.27 2482.47,1575.27 2504.64,1597.44 2514.45,1597.44 Q5.2@2517.2,1600.19 ; R1.2 2730,2665 2830,2565 ; R10.2 v1(2930,2465) ; R12.2 2830,2565 ; R8.2 2830,2365 v1(2930,2465) ; Q6.2 2704.2,1596.75 2682.72,1575.27 2551.92,1575.27 2529.76,1597.44 2519.94,1597.44 Q5.2@2517.2,1600.19 ; Q1.2 3012.6,1598.11 3034.07,1576.63 3167.51,1576.63 3188.35,1597.48 3196.85,1597.48 3199.6,1600.23 Q2.2 3199.6,1601.55 3202.35,1598.8 3212.16,1598.8 3234.32,1576.63 3351.87,1576.63 3374.04,1598.8 3383.85,1598.8 3386.6,1601.55 Q3.2 ; R2.2@3152.89,2856.51 3021.51,2856.51 v1(2930,2765) ; R4.2 v1(2930,2765) ; 3161.72,2665 3030,2665 v1(2930,2765) ; Q3.2@3389.35,1606.45 3389.35,1598.8 3399.16,1598.8 3421.32,1576.63 3591.63,1576.63 v1(3625,1610) ; Q5.2@2517.2,1600.19 Q5.2 Q5.2@2517.2,1600.19 ; 2830,2565 v1(2930,2465)
Green_PWM: J3.9 R6.2 R7.1 | length 751.7
  Top Layer w15: 3215,2665 J3.9 3397.65,2657.65 3397.65,2623.09 3264.63,2490.07 3264.63,2162.02 R7.1
Green_PWM_2: J2.8 R12.1 R13.1 | length 846
  Top Layer w15: J2.8 R12.1 ; R13.1 2844,2162.64 2844,2254 v1(2845,2255)
  Layer 2 w15: J2.8 2535,2565 v1(2845,2255)
NetD1_1: D1.1 L1.1 U1.2 | length 1076.2
  Top Layer w15: D1.1 1451.28,2572.2 U1.2@1546.42,2477.06 ; L1.1 1528.97,1885 1465,1948.97 1465,2395.64 U1.2@1546.42,2477.06 ; U1.2 U1.2@1546.42,2477.06
NetJ2_4: J2.4 P2.2 | length 1411.6
  Layer 1 w15: J2.4 2555,3115 3653.98,3115 P2.2
NetJ2_5: J2.5 P3.2 | length 1397
  Layer 1 w15: J2.5 2455,2915 3589.02,2915 P3.2
NetJ2_7: J2.7 P1.2 R1.1 | length 939
  Top Layer w15: P1.2 2255,3010 2255,2815 J2.7 R1.1
NetJ3_6: J3.6 P5.2 | length 541.3
  Top Layer w15: J3.6 3417.67,2365 3430.55,2352.12 3432.88,2352.12 3545,2240 3545,2145 P5.2
NetJ3_7: J3.7 P4.2 | length 358.5
  Top Layer w15: J3.7 3497.99,2372.01 P4.2
NetP6_2: P6.2 Q3.3 | length 275
  Top Layer w15: P6.2 3424,1429 Q3.3
NetP6_3: P6.3 Q2.3 | length 239
  Top Layer w15: P6.3 3237,1342 Q2.3
NetP6_4: P6.4 Q1.3 | length 244.4
  Top Layer w15: Q1.3 3050,1355 P6.4
NetP7_2: P7.2 Q6.3 | length 276.8
  Top Layer w15: P7.2 2741.6,1436.6 Q6.3
NetP7_3: P7.3 Q5.3 | length 240.8
  Top Layer w15: P7.3 2554.6,1349.6 Q5.3
NetP7_4: P7.4 Q4.3 | length 239.8
  Top Layer w15: Q4.3 2367.6,1347.4 P7.4
NetQ1_1: Q1.1 R3.2 | length 529.4
  Top Layer w15: R3.2 3009.25,1720.73 3087.4,1642.58 Q1.1
NetQ2_1: Q2.1 R5.2 | length 554
  Top Layer w15: R5.2 3136.75,1780.23 3274.4,1642.58 Q2.1
NetQ3_1: Q3.1 R7.2 | length 578.7
  Top Layer w15: R7.2 3264.25,1839.73 3461.4,1642.58 Q3.1
NetQ4_1: Q4.1 R9.2 | length 568.8
  Top Layer w15: Q4.1 2405,1641.23 2575,1811.23 R9.2
NetQ5_1: Q5.1 R11.2 | length 546.8
  Top Layer w15: Q5.1 2592,1641.23 2709,1758.23 R11.2
NetQ6_1: Q6.1 R13.2 | length 524.9
  Top Layer w15: Q6.1 2779,1641.23 2843,1705.23 R13.2
Red_PWM: J3.10 R4.1 R5.1 | length 910.5
  Top Layer w15: v1(3135,2345) 3135.88,2344.12 3135.88,2162.52 R5.1 ; v1@3135,2350 v1@3135.88,2349.12 ; R4.1 J3.10
  Layer 2 w15: v1(3135,2345) 3135,2495 J3.10
Red_PWM_2: J2.9 R10.1 R11.1 | length 688
  Top Layer w15: J2.9 R10.1 ; R11.1 2709.5,2162.14 2709.5,2259.5 v1(2710,2260)
  Layer 2 w15: J2.9 2535,2465 2709.42,2290.58 2709.42,2260.58 v1(2710,2260)
pads on no net: J2.1 J2.2 J2.3 J2.6 J2.11 J2.12 J2.13 J3.2 J3.3 J3.4 J3.5 J3.8 J3.12 J3.13 J3.14 J3.15 U1.6

## Polygon pours and split planes (outlines as drawn)
+24_LED on Layer 1 "+24_LED_L02_P004" (solid, pour order 4): 3515,1415 3510,1415 2035,1415 2035,3375 1775,3375 1780,1195 1790,1195 3515,1195
+3V3 on Layer 2 "+3V3_L03_P005" (solid, pour order 5): 3785,3390 3660,3390 3660,2084.23 3510,1940 3505,1940 3335,1940 3335,1775 3340,1770 3785,1770
GND on Bottom Layer "GND_L04_P000" (solid, pour order 0): 3835,1100 3835,3414.99 1025,3420 1027.85,1622.15 1550,1100 2985,1100

## Silkscreen, mask and mechanical layers (free items; w line width, h text height)
Top Overlay:
  text "Velexen / E-LED V1" at 2550,3130 h60
Mechanical 1:
  lines w10: 1020,3420 1020,1095 3840,1095 3840,3420 1020,3422.84